# Altium PCB main_old.PcbDoc (part 14 of 15)
Units mil, origin at the board's own origin, x right, y up, seen from the top; angles counter-clockwise.
Board outline 8394.55 x 5164.44 mil, 7 copper layers (Top Layer 1, Layer 2, Layer 3, Unused, Layer 4_pow, Layer 5_gnd, Bottom 6+gnd), stack 46.112 mil thick; 363 components, 409 nets, 1750 pads, 991 vias.
Unrouted connection lines stored in the file: 1.
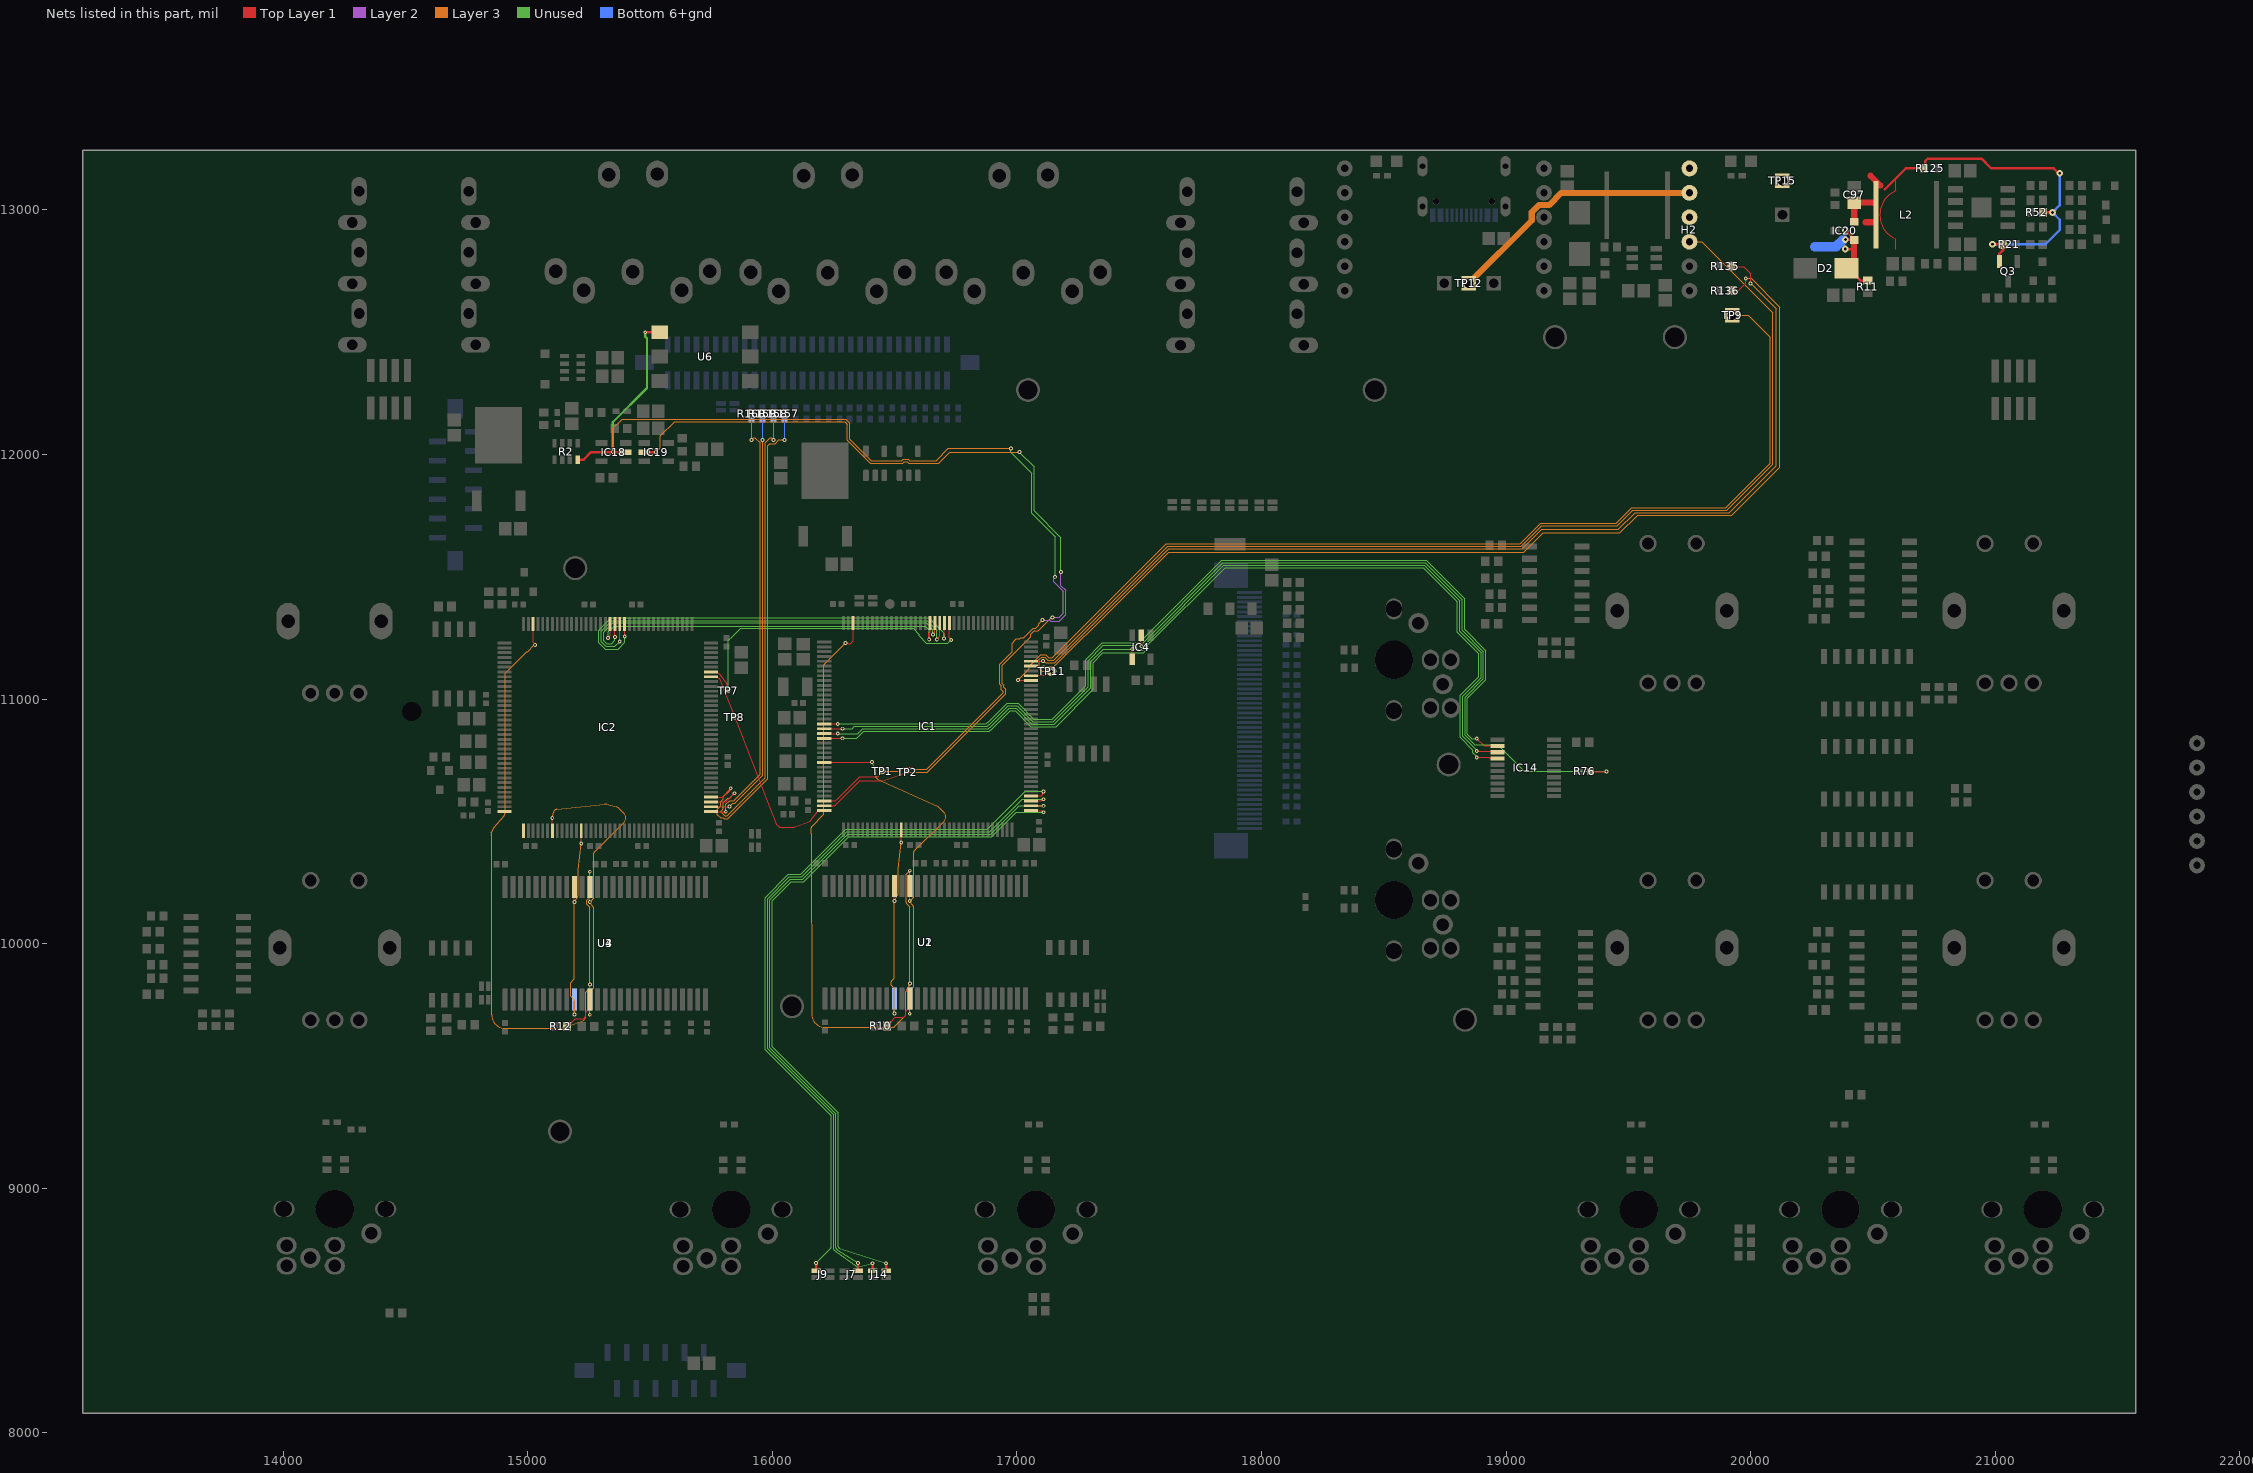
[diagram p17: the nets of this part, all layers, seen from the top]

## Via types
v1: diameter 15.75, hole 7.87, Top Layer 1 to Bottom 6+gnd, tented both sides, 923 vias
v2: diameter 27.56, hole 11.81, Top Layer 1 to Bottom 6+gnd, 45 vias
v3: diameter 23.62/23.62/23.62/23.62/23.62/23.62/23.62 (per signal layer), hole 12, Top Layer 1 to Bottom 6+gnd, tented top, 10 vias
v4: diameter 15.75, hole 7.87, Top Layer 1 to Bottom 6+gnd, 10 vias
v5: diameter 23.62/23.62/23.62/23.62/23.62/23.62/23.62 (per signal layer), hole 12, Top Layer 1 to Bottom 6+gnd, tented bottom, 3 vias

## Nets (pads, with @x,y where several pads share a name; then routed paths per layer and width w, separated by ;. In a path a pad name is that pad's centre, name@x,y a point inside that pad or via, vN(x,y) a via of type N, cw(c..) or ccw(c..) an arc to the next point about the centre after c; other vN are vias at no path point) (continued)
SDNRAS1_7: IC2.49 U3.18 U4.18 | length 997.4
  Top Layer 1 w5: v1@15190.72,10170.19 U3.18@15190.72,10232.03 ; v1(15218.49,10409.41) IC2.49@15218.46,10461.85
  Layer 3 w5: 15189.01,9771.24 15175.59,9784.66 15175.59,9840.83 15190.47,9855.72 v1(15190.47,10169.94) v1@15191.1,10171.08 ; v1(15190.47,9710.68) 15190.44,9767.73 ; v1@15191.16,10171.18 ccw(c15195.47,10168.64) v1@15191.1,10171.08 ; 15205.84,10197.52 15205.84,10301.7 ; v1(15218.49,10409.41) 15205.88,10302.29 ; 15189.04,9771.21 cw(c15185.44,9767.73) 15190.44,9767.73 ; 15189.04,9771.21 cw(c15185.44,9767.73) 15190.44,9767.73 ; 15189.04,9771.21 cw(c15185.44,9767.73) 15190.44,9767.73 ; 15189.04,9771.21 cw(c15185.44,9767.73) 15190.44,9767.73 ; 15189.04,9771.21 cw(c15185.44,9767.73) 15190.44,9767.73 ; 15189.04,9771.21 cw(c15185.44,9767.73) 15190.44,9767.73 ; 15189.04,9771.21 cw(c15185.44,9767.73) 15190.44,9767.73 ; 15189.04,9771.21 cw(c15185.44,9767.73) 15190.44,9767.73 ; 15189.04,9771.21 cw(c15185.44,9767.73) 15190.44,9767.73 ; 15189.04,9771.21 cw(c15185.44,9767.73) 15190.44,9767.73 ; 15189.04,9771.21 cw(c15185.44,9767.73) 15190.44,9767.73 ; 15189.04,9771.21 cw(c15185.44,9767.73) 15190.44,9767.73 ; 15189.04,9771.21 cw(c15185.44,9767.73) 15190.44,9767.73 ; 15189.04,9771.21 cw(c15185.44,9767.73) 15190.44,9767.73 ; 15189.04,9771.21 cw(c15185.44,9767.73) 15190.44,9767.73 ; 15189.04,9771.21 cw(c15185.44,9767.73) 15190.44,9767.73 ; v1@15191.1,10171.08 cw(c15195.47,10168.64) v1@15191.16,10171.17 ; v1@15191.1,10171.08 cw(c15195.47,10168.64) v1@15191.16,10171.17 ; v1@15191.1,10171.08 cw(c15195.47,10168.64) v1@15191.16,10171.17 ; v1@15191.1,10171.08 cw(c15195.47,10168.64) v1@15191.16,10171.17 ; v1@15191.1,10171.08 cw(c15195.47,10168.64) v1@15191.16,10171.17 ; v1@15191.1,10171.08 cw(c15195.47,10168.64) v1@15191.16,10171.17 ; v1@15191.1,10171.08 cw(c15195.47,10168.64) v1@15191.16,10171.17 ; v1@15191.1,10171.08 cw(c15195.47,10168.64) v1@15191.16,10171.17 ; v1@15191.1,10171.08 cw(c15195.47,10168.64) v1@15191.16,10171.17 ; v1@15191.1,10171.08 cw(c15195.47,10168.64) v1@15191.16,10171.17 ; v1@15191.1,10171.08 cw(c15195.47,10168.64) v1@15191.16,10171.17 ; v1@15191.1,10171.08 cw(c15195.47,10168.64) v1@15191.16,10171.17 ; v1@15191.1,10171.08 cw(c15195.47,10168.64) v1@15191.16,10171.17 ; v1@15191.1,10171.08 cw(c15195.47,10168.64) v1@15191.16,10171.17 ; v1@15191.1,10171.08 cw(c15195.47,10168.64) v1@15191.16,10171.17 ; v1@15191.16,10171.17 15205.16,10195.03 ; 15205.16,10195.03 ccw(c15200.84,10197.56) 15205.84,10197.47 ; 15205.16,10195.03 ccw(c15200.84,10197.56) 15205.84,10197.47 ; 15205.16,10195.03 ccw(c15200.84,10197.56) 15205.84,10197.47 ; 15205.16,10195.03 ccw(c15200.84,10197.56) 15205.84,10197.47 ; 15205.16,10195.03 ccw(c15200.84,10197.56) 15205.84,10197.47 ; 15205.16,10195.03 ccw(c15200.84,10197.56) 15205.84,10197.47 ; 15205.16,10195.03 ccw(c15200.84,10197.56) 15205.84,10197.47 ; 15205.16,10195.03 ccw(c15200.84,10197.56) 15205.84,10197.47 ; 15205.16,10195.03 ccw(c15200.84,10197.56) 15205.84,10197.47 ; 15205.16,10195.03 ccw(c15200.84,10197.56) 15205.84,10197.47 ; 15205.16,10195.03 ccw(c15200.84,10197.56) 15205.84,10197.47 ; 15205.16,10195.03 ccw(c15200.84,10197.56) 15205.84,10197.47 ; 15205.16,10195.03 ccw(c15200.84,10197.56) 15205.84,10197.47 ; 15205.16,10195.03 ccw(c15200.84,10197.56) 15205.84,10197.47 ; 15205.16,10195.03 ccw(c15200.84,10197.56) 15205.84,10197.47 ; 15205.16,10195.03 ccw(c15200.84,10197.56) 15205.84,10197.47 ; 15205.84,10301.7 cw(c15210.85,10301.7) 15205.88,10302.29 ; 15205.84,10301.7 cw(c15210.85,10301.7) 15205.88,10302.29 ; 15205.84,10301.7 cw(c15210.85,10301.7) 15205.88,10302.29 ; 15205.84,10301.7 cw(c15210.85,10301.7) 15205.88,10302.29 ; 15205.84,10301.7 cw(c15210.85,10301.7) 15205.88,10302.29 ; 15205.84,10301.7 cw(c15210.85,10301.7) 15205.88,10302.29 ; 15205.84,10301.7 cw(c15210.85,10301.7) 15205.88,10302.29 ; 15205.84,10301.7 cw(c15210.85,10301.7) 15205.88,10302.29 ; 15205.84,10301.7 cw(c15210.85,10301.7) 15205.88,10302.29 ; 15205.84,10301.7 cw(c15210.85,10301.7) 15205.88,10302.29 ; 15205.84,10301.7 cw(c15210.85,10301.7) 15205.88,10302.29 ; 15205.84,10301.7 cw(c15210.85,10301.7) 15205.88,10302.29 ; 15205.84,10301.7 cw(c15210.85,10301.7) 15205.88,10302.29 ; 15205.84,10301.7 cw(c15210.85,10301.7) 15205.88,10302.29 ; 15205.84,10301.7 cw(c15210.85,10301.7) 15205.88,10302.29 ; 15205.84,10301.7 cw(c15210.85,10301.7) 15205.88,10302.29
  Bottom 6+gnd w5: v1(15190.47,9710.68) 15190.47,9771.15 U4.18@15190.72,9771.4
SDNRAS_6: IC1.49 U1.18 U2.18 | length 1102.4
  Top Layer 1 w5: v1(16498.77,10174.13) U1.18@16498.77,10235.97 ; v1@16499.02,10174.38 U1.18@16499.02,10236.22 ; v1(16526.79,10413.6) IC1.49@16526.76,10466.04
  Layer 3 w5: v1(16498.77,9714.87) 16498.77,9812.06 ; 16498.77,9861.98 v1(16498.77,10174.13) v1@16499.4,10175.27 ; 16514.14,10201.71 16514.14,10305.89 ; v1(16526.79,10413.6) 16514.18,10306.48 ; 16497.49,9858.68 ccw(c16493.77,9862.02) 16498.77,9861.93 ; 16497.49,9858.68 ccw(c16493.77,9862.02) 16498.77,9861.93 ; 16497.49,9858.68 ccw(c16493.77,9862.02) 16498.77,9861.93 ; 16497.49,9858.68 ccw(c16493.77,9862.02) 16498.77,9861.93 ; 16497.49,9858.68 ccw(c16493.77,9862.02) 16498.77,9861.93 ; 16497.49,9858.68 ccw(c16493.77,9862.02) 16498.77,9861.93 ; 16497.49,9858.68 ccw(c16493.77,9862.02) 16498.77,9861.93 ; 16497.49,9858.68 ccw(c16493.77,9862.02) 16498.77,9861.93 ; 16497.49,9858.68 ccw(c16493.77,9862.02) 16498.77,9861.93 ; 16497.49,9858.68 ccw(c16493.77,9862.02) 16498.77,9861.93 ; 16497.49,9858.68 ccw(c16493.77,9862.02) 16498.77,9861.93 ; 16497.49,9858.68 ccw(c16493.77,9862.02) 16498.77,9861.93 ; 16497.49,9858.68 ccw(c16493.77,9862.02) 16498.77,9861.93 ; 16497.49,9858.68 ccw(c16493.77,9862.02) 16498.77,9861.93 ; 16497.49,9858.68 ccw(c16493.77,9862.02) 16498.77,9861.93 ; 16497.49,9858.68 ccw(c16493.77,9862.02) 16498.77,9861.93 ; 16497.49,9858.68 16487.84,9847.96 ccw(c16499.26,9837.68) 16487.29,9828.03 16497.66,9815.15 ; 16497.66,9815.15 cw(c16493.77,9812.02) 16498.77,9812.11 ; 16497.66,9815.15 cw(c16493.77,9812.02) 16498.77,9812.11 ; 16497.66,9815.15 cw(c16493.77,9812.02) 16498.77,9812.11 ; 16497.66,9815.15 cw(c16493.77,9812.02) 16498.77,9812.11 ; 16497.66,9815.15 cw(c16493.77,9812.02) 16498.77,9812.11 ; 16497.66,9815.15 cw(c16493.77,9812.02) 16498.77,9812.11 ; 16497.66,9815.15 cw(c16493.77,9812.02) 16498.77,9812.11 ; 16497.66,9815.15 cw(c16493.77,9812.02) 16498.77,9812.11 ; 16497.66,9815.15 cw(c16493.77,9812.02) 16498.77,9812.11 ; 16497.66,9815.15 cw(c16493.77,9812.02) 16498.77,9812.11 ; 16497.66,9815.15 cw(c16493.77,9812.02) 16498.77,9812.11 ; 16497.66,9815.15 cw(c16493.77,9812.02) 16498.77,9812.11 ; 16497.66,9815.15 cw(c16493.77,9812.02) 16498.77,9812.11 ; 16497.66,9815.15 cw(c16493.77,9812.02) 16498.77,9812.11 ; 16497.66,9815.15 cw(c16493.77,9812.02) 16498.77,9812.11 ; 16497.66,9815.15 cw(c16493.77,9812.02) 16498.77,9812.11 ; v1@16499.4,10175.27 cw(c16503.77,10172.83) v1@16499.46,10175.36 ; v1@16499.4,10175.27 cw(c16503.77,10172.83) v1@16499.46,10175.36 ; v1@16499.4,10175.27 cw(c16503.77,10172.83) v1@16499.46,10175.36 ; v1@16499.4,10175.27 cw(c16503.77,10172.83) v1@16499.46,10175.36 ; v1@16499.4,10175.27 cw(c16503.77,10172.83) v1@16499.46,10175.37 ; v1@16499.4,10175.27 cw(c16503.77,10172.83) v1@16499.46,10175.36 ; v1@16499.4,10175.27 cw(c16503.77,10172.83) v1@16499.46,10175.36 ; v1@16499.4,10175.27 cw(c16503.77,10172.83) v1@16499.46,10175.36 ; v1@16499.4,10175.27 cw(c16503.77,10172.83) v1@16499.46,10175.36 ; v1@16499.4,10175.27 cw(c16503.77,10172.83) v1@16499.46,10175.36 ; v1@16499.4,10175.27 cw(c16503.77,10172.83) v1@16499.46,10175.36 ; v1@16499.4,10175.27 cw(c16503.77,10172.83) v1@16499.46,10175.36 ; v1@16499.4,10175.27 cw(c16503.77,10172.83) v1@16499.46,10175.36 ; v1@16499.4,10175.27 cw(c16503.77,10172.83) v1@16499.46,10175.36 ; v1@16499.4,10175.27 cw(c16503.77,10172.83) v1@16499.46,10175.36 ; v1@16499.4,10175.27 cw(c16503.77,10172.83) v1@16499.46,10175.36 ; v1@16499.46,10175.36 16513.46,10199.22 ; 16513.46,10199.22 ccw(c16509.14,10201.75) 16514.14,10201.66 ; 16513.46,10199.22 ccw(c16509.14,10201.75) 16514.14,10201.66 ; 16513.46,10199.22 ccw(c16509.14,10201.75) 16514.14,10201.66 ; 16513.46,10199.22 ccw(c16509.14,10201.75) 16514.14,10201.66 ; 16513.46,10199.22 ccw(c16509.14,10201.75) 16514.14,10201.66 ; 16513.46,10199.22 ccw(c16509.14,10201.75) 16514.14,10201.66 ; 16513.46,10199.22 ccw(c16509.14,10201.75) 16514.14,10201.66 ; 16513.46,10199.22 ccw(c16509.14,10201.75) 16514.14,10201.66 ; 16513.46,10199.22 ccw(c16509.14,10201.75) 16514.14,10201.66 ; 16513.46,10199.22 ccw(c16509.14,10201.75) 16514.14,10201.66 ; 16513.46,10199.22 ccw(c16509.14,10201.75) 16514.14,10201.66 ; 16513.46,10199.22 ccw(c16509.14,10201.75) 16514.14,10201.66 ; 16513.46,10199.22 ccw(c16509.14,10201.75) 16514.14,10201.66 ; 16513.46,10199.22 ccw(c16509.14,10201.75) 16514.14,10201.66 ; 16513.46,10199.22 ccw(c16509.14,10201.75) 16514.14,10201.66 ; 16513.46,10199.22 ccw(c16509.14,10201.75) 16514.14,10201.66 ; 16514.14,10305.89 cw(c16519.15,10305.89) 16514.18,10306.48 ; 16514.14,10305.89 cw(c16519.15,10305.89) 16514.18,10306.48 ; 16514.14,10305.89 cw(c16519.15,10305.89) 16514.18,10306.48 ; 16514.14,10305.89 cw(c16519.15,10305.89) 16514.18,10306.48 ; 16514.14,10305.89 cw(c16519.15,10305.89) 16514.18,10306.48 ; 16514.14,10305.89 cw(c16519.15,10305.89) 16514.18,10306.48 ; 16514.14,10305.89 cw(c16519.15,10305.89) 16514.18,10306.48 ; 16514.14,10305.89 cw(c16519.15,10305.89) 16514.18,10306.48 ; 16514.14,10305.89 cw(c16519.15,10305.89) 16514.18,10306.48 ; 16514.14,10305.89 cw(c16519.15,10305.89) 16514.18,10306.48 ; 16514.14,10305.89 cw(c16519.15,10305.89) 16514.18,10306.48 ; 16514.14,10305.89 cw(c16519.15,10305.89) 16514.18,10306.48 ; 16514.14,10305.89 cw(c16519.15,10305.89) 16514.18,10306.48 ; 16514.14,10305.89 cw(c16519.15,10305.89) 16514.18,10306.48 ; 16514.14,10305.89 cw(c16519.15,10305.89) 16514.18,10306.48 ; 16514.14,10305.89 cw(c16519.15,10305.89) 16514.18,10306.48
  Bottom 6+gnd w5: v1(16498.77,9714.87) 16498.77,9775.34 U2.18@16499.02,9775.59
SDNWE1_7: IC2.43 U3.16 U4.16 | length 2368
  Top Layer 1 w5: IC2.43@15100.32,10461.87 v1@15100.32,10514.16 ; v1@15253.71,10170.19 U3.16@15253.71,10232.03
  Layer 3 w5: v1(15100.09,10514.39) 15105.05,10537.61 cw(c15120.09,10534.39) 15118.51,10549.69 15314.1,10569.87 cw(c15316.7,10544.63) 15323.05,10569.2 15362.66,10558.96 ; v1(15253.46,9709.31) 15253.46,9803 15269.58,9819.12 15269.58,10145.78 ; 15269.15,10187.7 15269.15,10369.91 cw(c15274.15,10369.91) 15270.6,10373.43 15393.65,10496.48 ; v1@15253.46,10167.87 ccw(c15258.46,10167.88) v1@15254.7,10164.58 ; v1@15253.46,10167.87 ccw(c15258.46,10167.88) v1@15254.7,10164.58 ; v1@15253.46,10167.87 ccw(c15258.46,10167.88) v1@15254.7,10164.58 ; v1@15253.46,10167.87 ccw(c15258.46,10167.88) v1@15254.7,10164.58 ; v1@15253.46,10167.87 ccw(c15258.46,10167.88) v1@15254.7,10164.58 ; v1@15253.46,10167.87 ccw(c15258.46,10167.88) v1@15254.7,10164.58 ; v1@15253.46,10167.87 ccw(c15258.46,10167.88) v1@15254.7,10164.58 ; v1@15253.46,10167.87 ccw(c15258.46,10167.88) v1@15254.7,10164.58 ; v1@15253.46,10167.87 ccw(c15258.46,10167.88) v1@15254.7,10164.58 ; v1@15253.46,10167.87 ccw(c15258.46,10167.88) v1@15254.7,10164.58 ; v1@15253.46,10167.87 ccw(c15258.46,10167.88) v1@15254.7,10164.58 ; v1@15253.46,10167.87 ccw(c15258.46,10167.88) v1@15254.7,10164.58 ; v1@15253.46,10167.87 ccw(c15258.46,10167.88) v1@15254.7,10164.58 ; v1@15253.46,10167.87 ccw(c15258.46,10167.88) v1@15254.7,10164.58 ; v1@15253.46,10167.87 ccw(c15258.46,10167.88) v1@15254.7,10164.58 ; v1@15253.46,10167.87 ccw(c15258.46,10167.88) v1@15254.7,10164.58 ; v1@15253.46,10167.87 v1(15253.46,10169.94) 15267.69,10184.22 ; v1@15254.7,10164.58 15268.34,10149.04 ; 15267.69,10184.22 ccw(c15264.15,10187.75) 15269.15,10187.66 ; 15267.69,10184.22 ccw(c15264.15,10187.75) 15269.15,10187.66 ; 15267.69,10184.22 ccw(c15264.15,10187.75) 15269.15,10187.66 ; 15267.69,10184.22 ccw(c15264.15,10187.75) 15269.15,10187.66 ; 15267.69,10184.22 ccw(c15264.15,10187.75) 15269.15,10187.66 ; 15267.69,10184.22 ccw(c15264.15,10187.75) 15269.15,10187.66 ; 15267.69,10184.22 ccw(c15264.15,10187.75) 15269.15,10187.66 ; 15267.69,10184.22 ccw(c15264.15,10187.75) 15269.15,10187.66 ; 15267.69,10184.22 ccw(c15264.15,10187.75) 15269.15,10187.66 ; 15267.69,10184.22 ccw(c15264.15,10187.75) 15269.15,10187.66 ; 15267.69,10184.22 ccw(c15264.15,10187.75) 15269.15,10187.66 ; 15267.69,10184.22 ccw(c15264.15,10187.75) 15269.15,10187.66 ; 15267.69,10184.22 ccw(c15264.15,10187.75) 15269.15,10187.66 ; 15267.69,10184.22 ccw(c15264.15,10187.75) 15269.15,10187.66 ; 15267.69,10184.22 ccw(c15264.15,10187.75) 15269.15,10187.66 ; 15267.69,10184.22 ccw(c15264.15,10187.75) 15269.15,10187.66 ; 15268.34,10149.04 cw(c15264.58,10145.74) 15269.58,10145.83 ; 15268.34,10149.04 cw(c15264.58,10145.74) 15269.58,10145.83 ; 15268.34,10149.04 cw(c15264.58,10145.74) 15269.58,10145.83 ; 15268.34,10149.04 cw(c15264.58,10145.74) 15269.58,10145.83 ; 15268.34,10149.04 cw(c15264.58,10145.74) 15269.58,10145.83 ; 15268.34,10149.04 cw(c15264.58,10145.74) 15269.58,10145.83 ; 15268.34,10149.04 cw(c15264.58,10145.74) 15269.58,10145.83 ; 15268.34,10149.04 cw(c15264.58,10145.74) 15269.58,10145.83 ; 15268.34,10149.04 cw(c15264.58,10145.74) 15269.58,10145.83 ; 15268.34,10149.04 cw(c15264.58,10145.74) 15269.58,10145.83 ; 15268.34,10149.04 cw(c15264.58,10145.74) 15269.58,10145.83 ; 15268.34,10149.04 cw(c15264.58,10145.74) 15269.58,10145.83 ; 15268.34,10149.04 cw(c15264.58,10145.74) 15269.58,10145.83 ; 15268.34,10149.04 cw(c15264.58,10145.74) 15269.58,10145.83 ; 15268.34,10149.04 cw(c15264.58,10145.74) 15269.58,10145.83 ; 15268.34,10149.04 cw(c15264.58,10145.74) 15269.58,10145.83 ; 15362.66,10558.96 cw(c15356.31,10534.39) 15374.54,10552.04 ; 15362.66,10558.96 cw(c15356.31,10534.39) 15374.54,10552.04 ; 15362.66,10558.96 cw(c15356.31,10534.39) 15374.54,10552.04 ; 15362.66,10558.96 cw(c15356.31,10534.39) 15374.54,10552.04 ; 15362.66,10558.96 cw(c15356.31,10534.39) 15374.54,10552.04 ; 15362.66,10558.96 cw(c15356.31,10534.39) 15374.54,10552.04 ; 15362.66,10558.96 cw(c15356.31,10534.39) 15374.54,10552.04 ; 15362.66,10558.96 cw(c15356.31,10534.39) 15374.54,10552.04 ; 15362.66,10558.96 cw(c15356.31,10534.39) 15374.54,10552.04 ; 15362.66,10558.96 cw(c15356.31,10534.39) 15374.54,10552.04 ; 15362.66,10558.96 cw(c15356.31,10534.39) 15374.54,10552.04 ; 15362.66,10558.96 cw(c15356.31,10534.39) 15374.54,10552.04 ; 15362.66,10558.96 cw(c15356.31,10534.39) 15374.54,10552.04 ; 15362.66,10558.96 cw(c15356.31,10534.39) 15374.54,10552.04 ; 15362.66,10558.96 cw(c15356.31,10534.39) 15374.54,10552.04 ; 15362.66,10558.96 cw(c15356.31,10534.39) 15374.54,10552.04 ; 15374.54,10552.04 15393.9,10532.04 ; 15393.65,10496.48 ccw(c15375.68,10514.39) 15393.9,10532.05 ; 15393.65,10496.48 ccw(c15375.68,10514.39) 15393.9,10532.04 ; 15393.65,10496.48 ccw(c15375.68,10514.39) 15393.9,10532.04 ; 15393.65,10496.48 ccw(c15375.68,10514.39) 15393.9,10532.04 ; 15393.65,10496.48 ccw(c15375.68,10514.39) 15393.9,10532.04 ; 15393.65,10496.48 ccw(c15375.68,10514.39) 15393.9,10532.04 ; 15393.65,10496.48 ccw(c15375.68,10514.39) 15393.9,10532.04 ; 15393.65,10496.48 ccw(c15375.68,10514.39) 15393.9,10532.04 ; 15393.65,10496.48 ccw(c15375.68,10514.39) 15393.9,10532.04 ; 15393.65,10496.48 ccw(c15375.68,10514.39) 15393.9,10532.04 ; 15393.65,10496.48 ccw(c15375.68,10514.39) 15393.9,10532.04 ; 15393.65,10496.48 ccw(c15375.68,10514.39) 15393.9,10532.04 ; 15393.65,10496.48 ccw(c15375.68,10514.39) 15393.9,10532.04 ; 15393.65,10496.48 ccw(c15375.68,10514.39) 15393.9,10532.04 ; 15393.65,10496.48 ccw(c15375.68,10514.39) 15393.9,10532.04 ; 15393.65,10496.48 ccw(c15375.68,10514.39) 15393.9,10532.04
  Bottom 6+gnd w5: v1@15253.71,9709.56 U4.16@15253.71,9771.4
SDNWE_6: IC1.26 U1.16 U2.16 | length 2408.3
  Top Layer 1 w5: IC1.26@16212.26,10741.2 16406.98,10741.2 v1(16407.89,10742.1) ; v1@16562.01,10174.38 U1.16@16562.01,10236.22
  Layer 3 w5: v1(16407.89,10742.1) 16422.16,10683.52 ccw(c16437.09,10687.2) 16430.7,10673.22 16675.14,10561.67 cw(c16664.61,10538.58) 16682.83,10556.24 16702.2,10536.23 ; v1(16561.76,9713.5) 16561.76,9805.11 cw(c16566.76,9805.12) 16563.21,9808.63 16576.43,9821.89 ; v1@16562.99,10168.77 16576.64,10153.23 ; 16577.45,10191.89 16577.45,10374.1 cw(c16582.45,10374.1) 16578.9,10377.62 16701.95,10500.67 ; 16577.88,9825.38 16577.88,10149.97 ; v1@16561.76,10172.06 ccw(c16566.76,10172.06) v1@16562.99,10168.78 ; v1@16561.76,10172.06 ccw(c16566.76,10172.06) v1@16562.99,10168.78 ; v1@16561.76,10172.06 ccw(c16566.76,10172.06) v1@16562.99,10168.78 ; v1@16561.76,10172.06 ccw(c16566.76,10172.06) v1@16562.99,10168.78 ; v1@16561.76,10172.06 ccw(c16566.76,10172.06) v1@16562.99,10168.78 ; v1@16561.76,10172.06 ccw(c16566.76,10172.06) v1@16562.99,10168.78 ; v1@16561.76,10172.06 ccw(c16566.76,10172.06) v1@16562.99,10168.78 ; v1@16561.76,10172.06 ccw(c16566.76,10172.06) v1@16562.99,10168.78 ; v1@16561.76,10172.06 ccw(c16566.76,10172.06) v1@16562.99,10168.78 ; v1@16561.76,10172.06 ccw(c16566.76,10172.06) v1@16562.99,10168.78 ; v1@16561.76,10172.06 ccw(c16566.76,10172.06) v1@16562.99,10168.78 ; v1@16561.76,10172.06 ccw(c16566.76,10172.06) v1@16562.99,10168.78 ; v1@16561.76,10172.06 ccw(c16566.76,10172.06) v1@16562.99,10168.78 ; v1@16561.76,10172.06 ccw(c16566.76,10172.06) v1@16562.99,10168.78 ; v1@16561.76,10172.06 ccw(c16566.76,10172.06) v1@16562.99,10168.78 ; v1@16561.76,10172.06 ccw(c16566.76,10172.06) v1@16562.99,10168.78 ; v1@16561.76,10172.06 v1(16561.76,10174.13) 16575.99,10188.41 ; 16575.99,10188.41 ccw(c16572.45,10191.94) 16577.45,10191.85 ; 16575.99,10188.41 ccw(c16572.45,10191.94) 16577.45,10191.85 ; 16575.99,10188.41 ccw(c16572.45,10191.94) 16577.45,10191.85 ; 16575.99,10188.41 ccw(c16572.45,10191.94) 16577.45,10191.85 ; 16575.99,10188.41 ccw(c16572.45,10191.94) 16577.45,10191.85 ; 16575.99,10188.41 ccw(c16572.45,10191.94) 16577.45,10191.85 ; 16575.99,10188.41 ccw(c16572.45,10191.94) 16577.45,10191.85 ; 16575.99,10188.41 ccw(c16572.45,10191.94) 16577.45,10191.85 ; 16575.99,10188.41 ccw(c16572.45,10191.94) 16577.45,10191.85 ; 16575.99,10188.41 ccw(c16572.45,10191.94) 16577.45,10191.85 ; 16575.99,10188.41 ccw(c16572.45,10191.94) 16577.45,10191.85 ; 16575.99,10188.41 ccw(c16572.45,10191.94) 16577.45,10191.85 ; 16575.99,10188.41 ccw(c16572.45,10191.94) 16577.45,10191.85 ; 16575.99,10188.41 ccw(c16572.45,10191.94) 16577.45,10191.85 ; 16575.99,10188.41 ccw(c16572.45,10191.94) 16577.45,10191.85 ; 16575.99,10188.41 ccw(c16572.45,10191.94) 16577.45,10191.85 ; 16576.43,9821.89 ccw(c16572.88,9825.42) 16577.88,9825.33 ; 16576.43,9821.89 ccw(c16572.88,9825.42) 16577.88,9825.33 ; 16576.43,9821.89 ccw(c16572.88,9825.42) 16577.88,9825.33 ; 16576.43,9821.89 ccw(c16572.88,9825.42) 16577.88,9825.33 ; 16576.43,9821.89 ccw(c16572.88,9825.42) 16577.88,9825.33 ; 16576.43,9821.89 ccw(c16572.88,9825.42) 16577.88,9825.33 ; 16576.43,9821.89 ccw(c16572.88,9825.42) 16577.88,9825.33 ; 16576.43,9821.89 ccw(c16572.88,9825.42) 16577.88,9825.33 ; 16576.43,9821.89 ccw(c16572.88,9825.42) 16577.88,9825.33 ; 16576.43,9821.89 ccw(c16572.88,9825.42) 16577.88,9825.33 ; 16576.43,9821.89 ccw(c16572.88,9825.42) 16577.88,9825.33 ; 16576.43,9821.89 ccw(c16572.88,9825.42) 16577.88,9825.33 ; 16576.43,9821.89 ccw(c16572.88,9825.42) 16577.88,9825.33 ; 16576.43,9821.89 ccw(c16572.88,9825.42) 16577.88,9825.33 ; 16576.43,9821.89 ccw(c16572.88,9825.42) 16577.88,9825.33 ; 16576.43,9821.89 ccw(c16572.88,9825.42) 16577.88,9825.33 ; 16576.64,10153.23 cw(c16572.88,10149.93) 16577.88,10150.02 ; 16576.64,10153.23 cw(c16572.88,10149.93) 16577.88,10150.02 ; 16576.64,10153.23 cw(c16572.88,10149.93) 16577.88,10150.02 ; 16576.64,10153.23 cw(c16572.88,10149.93) 16577.88,10150.02 ; 16576.64,10153.23 cw(c16572.88,10149.93) 16577.88,10150.02 ; 16576.64,10153.23 cw(c16572.88,10149.93) 16577.88,10150.02 ; 16576.64,10153.23 cw(c16572.88,10149.93) 16577.88,10150.02 ; 16576.64,10153.23 cw(c16572.88,10149.93) 16577.88,10150.02 ; 16576.64,10153.23 cw(c16572.88,10149.93) 16577.88,10150.02 ; 16576.64,10153.23 cw(c16572.88,10149.93) 16577.88,10150.02 ; 16576.64,10153.23 cw(c16572.88,10149.93) 16577.88,10150.02 ; 16576.64,10153.23 cw(c16572.88,10149.93) 16577.88,10150.02 ; 16576.64,10153.23 cw(c16572.88,10149.93) 16577.88,10150.02 ; 16576.64,10153.23 cw(c16572.88,10149.93) 16577.88,10150.02 ; 16576.64,10153.23 cw(c16572.88,10149.93) 16577.88,10150.02 ; 16576.64,10153.23 cw(c16572.88,10149.93) 16577.88,10150.02 ; 16701.95,10500.67 ccw(c16683.98,10518.58) 16702.2,10536.23 ; 16701.95,10500.67 ccw(c16683.98,10518.58) 16702.2,10536.23 ; 16701.95,10500.67 ccw(c16683.98,10518.58) 16702.2,10536.23 ; 16701.95,10500.67 ccw(c16683.98,10518.58) 16702.2,10536.23 ; 16701.95,10500.67 ccw(c16683.98,10518.58) 16702.2,10536.23 ; 16701.95,10500.67 ccw(c16683.98,10518.58) 16702.2,10536.24 ; 16701.95,10500.67 ccw(c16683.98,10518.58) 16702.2,10536.23 ; 16701.95,10500.67 ccw(c16683.98,10518.58) 16702.2,10536.23 ; 16701.95,10500.67 ccw(c16683.98,10518.58) 16702.2,10536.23 ; 16701.95,10500.67 ccw(c16683.98,10518.58) 16702.2,10536.23 ; 16701.95,10500.67 ccw(c16683.98,10518.58) 16702.2,10536.23 ; 16701.95,10500.67 ccw(c16683.98,10518.58) 16702.2,10536.23 ; 16701.95,10500.67 ccw(c16683.98,10518.58) 16702.2,10536.23 ; 16701.95,10500.67 ccw(c16683.98,10518.58) 16702.2,10536.23 ; 16701.95,10500.67 ccw(c16683.98,10518.58) 16702.2,10536.23 ; 16701.95,10500.67 ccw(c16683.98,10518.58) 16702.2,10536.23
  Bottom 6+gnd w5: v1@16562.01,9713.75 U2.16@16562.01,9775.59
SPI1_MISO: IC1.124 IC2.124 | length 1725.5
  Top Layer 1 w5: v1@15375.96,11234.87 IC2.124@15375.97,11307.38 ; v1(16672.21,11243.72) 16672.21,11245 16684.21,11257 IC1.124@16684.21,11311.57
  Unused w5: v1(15375.95,11234.85) 15374.85,11234.85 15355.74,11215.74 15318.93,11215.74 15300,11234.68 15300,11277.96 15343.21,11321.17 16633.71,11321.17 16672.37,11282.5 16672.37,11243.88 v1(16672.21,11243.72)
SPI1_MOSI: IC1.123 IC2.123 | length 1802.5
  Top Layer 1 w5: IC2.123@15395.66,11307.38 15395.9,11307.15 15395.9,11255.5 v1(15396.13,11255.26) ; v1(16702.09,11247.2) 16702.99,11248.11 16702.99,11310.67 IC1.123@16703.9,11311.57
  Unused w5: v1(15396.13,11255.26) 15396.13,11232.05 15368.8,11204.72 15315.82,11204.72 15290,11230.53 15290,11282.1 15341.14,11333.24 16638.71,11333.24 16702.09,11269.86 v1(16702.09,11247.2)
SPI1_NSS: IC1.125 IC2.125 | length 1601.7
  Top Layer 1 w5: v1(15355.97,11254.61) 15356.13,11254.77 15356.13,11307.23 IC2.125@15356.29,11307.38 ; v1(16657,11264.49) 16657,11265.71 16664.53,11273.24 IC1.125@16664.53,11311.57
  Unused w5: v1(15355.97,11254.61) 15355.97,11240.61 15342.4,11227.04 15321.78,11227.04 15310,11238.82 15310,11273.82 15347.35,11311.17 16629.56,11311.17 16656.64,11284.09 16656.64,11264.85 v1(16657,11264.49)
SPI1_SCK: IC1.126 IC2.126 | length 1523.1
  Top Layer 1 w5: v1(15328.33,11250.26) 15336.6,11258.53 IC2.126@15336.6,11307.38 ; v1(16641.05,11244.02) 16640.18,11244.89 16640.18,11270.38 16644.84,11275.04 IC1.126@16644.84,11311.57
  Unused w5: v1(15328.33,11250.26) 15328.33,11274.69 15352.47,11298.82 16624.45,11298.82 16641.63,11281.64 16641.63,11244.6 v1(16641.05,11244.02)
SPI2_ext.MISO_1: IC1.75 J14.2 | length 3111.9
  Top Layer 1 w5: IC1.75@17057.76,10583.7 17100.02,10583.7 17106.72,10590.4 v1(17108,10590.4)
  Top Layer 1 w10: J14.2@16410,8661.38 v1@16410,8693.12
  Unused w5: v1(16409.77,8693.35) 16353.4,8679.63 cw(c16349.77,8694.57) 16340.81,8682.08 16260.43,8739.72 cw(c16275,8760.03) 16258.05,8741.66 16251.61,8747.6 cw(c16255,8751.27) 16250,8751.27 16250,9300.53 15980,9570.53 15980,10184.25 16069.57,10273.82 16120.32,10273.82 16267.43,10420.93 16267.64,10420.93 16303.88,10457.17 16888.35,10457.17 17021.58,10590.4 v1(17108,10590.4)
SPI2_ext.MOSI_1: IC1.76 J9.4 | length 3044.7
  Top Layer 1 w5: IC1.76@17057.76,10603.38 17059.88,10605.51 17101.31,10605.51 17105.94,10610.14 17105.94,10620.51 v1(17108,10622.57)
  Top Layer 1 w10: J9.4@16178.66,8662.72 v1@16178.66,8694.46
  Unused w5: v1(16178.43,8694.69) 16238.53,8754.82 ccw(c16235,8758.36) 16240,8758.36 16240,9296.39 15970,9566.39 15970,10188.39 16065.43,10283.82 16116.18,10283.82 16263.29,10430.93 16263.5,10430.93 16299.74,10467.17 16878.35,10467.17 17033.75,10622.57 v1(17108,10622.57)
SPI2_ext.NSS_1: IC1.73 J14.4 | length 3077.8
  Top Layer 1 w5: IC1.73@17057.76,10544.33 17100.41,10544.33 17107.49,10537.25 v1(17108,10537.25)
  Top Layer 1 w10: J14.4@16465.12,8661.38 v1@16465.12,8693.12
  Unused w5: v1(16464.89,8693.35) 16273.44,8755.28 cw(c16275,8760.03) 16270,8760.03 16270,9308.82 16000,9578.82 16000,10175.96 16076.93,10252.9 16127.68,10252.9 16275.71,10400.93 16275.92,10400.93 16312.17,10437.17 16897.5,10437.17 16997.57,10537.25 v1(17108,10537.25)
SPI2_ext.SCK_1: IC1.74 J7.4 | length 3004.6
  Top Layer 1 w5: IC1.74@17057.76,10564.01 17057.91,10563.86 17107.84,10563.86 v1(17108,10563.7)
  Top Layer 1 w10: J7.4@16350,8662.6 v1@16350,8694.34
  Unused w5: v1(16349.77,8694.57) 16266.94,8747.38 cw(c16275,8760.03) 16264.42,8749.4 16261.45,8752.37 cw(c16265,8755.89) 16260,8755.89 16260,9304.68 15990,9574.68 15990,10180.11 16073.71,10263.82 16124.46,10263.82 16271.57,10410.93 16271.78,10410.93 16308.03,10447.17 16893.35,10447.17 17009.89,10563.7 v1(17108,10563.7)
SPI2_MISO: IC2.75 R158.1 | length 1969.1
  Top Layer 1 w5: IC2.75@15749.52,10579.51 15809.51,10579.51 v1(15845,10615)
  Layer 3 w5: v1(15845,10615) 15825,10595 15817.93,10595 15810,10587.07 15810,10586.99 15799.55,10576.55 15799.55,10571.73 15798.98,10571.16 15798.98,10550.74 15790.44,10542.21 15790.44,10536.77 15806.33,10520.88 15809.47,10524.03 15815.92,10524.03 15970,10678.11 15970,12048.26 15991.3,12069.56 15995.44,12069.56 v1(16005,12060)
  Bottom 6+gnd w5: v1(16005,12060) R158.1@16005,12144.72
SPI2_MOSI: IC2.76 R157.1 | length 2031.6
  Top Layer 1 w5: IC2.76@15749.52,10599.2 15794.2,10599.2 15829.55,10634.55 v1(15829.55,10635.6)
  Layer 3 w5: v1(15829.55,10635.6) 15827.49,10633.54 15827.49,10627.49 15800,10600 15800,10591.14 15788.37,10579.51 15788.37,10563.37 15775,10550 15775,10528.08 15788.37,10514.71 15798.36,10514.71 15802.19,10510.88 15816.92,10510.88 15980,10673.97 15980,12035 15989.63,12044.63 16011.37,12044.63 16026.74,12060 v1(16050,12060)
  Bottom 6+gnd w5: v1(16050,12060) R157.1@16050,12144.72
SPI2_NSS: IC2.73 R160.1 | length 1770.4
  Top Layer 1 w5: IC2.73@15749.52,10540.14 15808.81,10540.14 v1(15809.55,10539.4)
  Layer 3 w5: v1(15809.55,10539.4) 15809.55,10553.71 15808.98,10554.28 15808.98,10567.02 15809.55,10567.59 15809.55,10569.55 15825,10585 15842.16,10585 15950,10692.84 15950,12048.26 15928.7,12069.56 15924.56,12069.56 v1(15915,12060)
  Bottom 6+gnd w5: v1(15915,12060) R160.1@15915,12144.72
SPI2_SCK: IC2.74 R159.1 | length 1719.9
  Top Layer 1 w5: IC2.74@15749.52,10559.83 15749.93,10560.24 15823.94,10560.24 v1(15824.35,10560.65)
  Layer 3 w5: v1(15824.35,10560.65) 15838.7,10575 15846.3,10575 15960,10688.7 v1(15960,12060)
  Bottom 6+gnd w5: v1(15960,12060) R159.1@15960,12144.72
SPI5_MISO: IC1.20 IC4.4 | length 1561.4
  Top Layer 1 w5: IC1.20@16212.32,10859.22 v1@16267.2,10859.22 ; IC4.4@17470.98,11162.52 17470.98,11203.36 v1(17472.21,11204.59)
  Unused w5: v1(16267.27,10859.14) 16349.88,10859.14 16369.25,10878.51 16882.03,10878.51 16888.55,10885.04 16890.36,10885.04 16967.67,10962.34 16996.26,10962.34 17060.74,10897.86 17152.33,10897.86 17301.29,11046.82 17301.29,11153.51 17352.36,11204.59 v1(17472.21,11204.59)
SPI5_MOSI: IC1.21 IC14.4 | length 3881.6
  Top Layer 1 w5: IC1.21@16212.26,10839.62 v1(16286.38,10839.64) ; v1(18880,10761.57) 18928.42,10761.57 18932.79,10757.2 IC14.4@18964.33,10757.2
  Unused w5: v1(16286.38,10839.64) 16344.53,10839.64 16373.4,10868.51 16886.17,10868.51 16892.69,10875.04 16894.5,10875.04 16971.81,10952.34 16992.11,10952.34 17056.59,10887.86 17159.65,10887.86 17311.29,11039.51 17311.29,11149.37 17351,11189.09 17519.35,11189.09 17535.79,11205.53 17535.79,11223.04 17850.69,11537.94 18660.88,11537.94 18800,11398.82 18800,11273.06 18887.48,11185.58 18887.48,11090.67 18812.13,11015.33 18812.13,10844.26 18864.63,10791.77 18864.63,10780.95 18880,10765.58 v1(18880,10761.57)
SPI5_NSS: IC1.18 IC14.2 | length 3840.1
  Top Layer 1 w5: IC1.18@16212.24,10898.66 16212.32,10898.59 16267.2,10898.59 v1(16267.27,10898.51) ; v1(18880,10838.82) 18910.43,10808.38 IC14.2@18964.33,10808.38
  Unused w5: v1(16267.27,10898.51) 16873.75,10898.51 16880.27,10905.04 16882.08,10905.04 16959.38,10982.34 17004.54,10982.34 17069.02,10917.86 17144.05,10917.86 17281.29,11055.11 17281.29,11161.8 17349.45,11229.96 17500.29,11229.96 17838.26,11567.94 18673.31,11567.94 18830,11411.25 18830,11285.48 18917.48,11198.01 18917.48,11078.24 18842.13,11002.9 18842.13,10856.68 18860,10838.82 v1(18880,10838.82)
SPI5_SCK: IC1.19 IC14.3 | length 3871.6
  Top Layer 1 w5: IC1.19@16212.26,10878.99 v1(16286.38,10879.01) ; v1(18880,10787.32) 18959.8,10787.32 IC14.3@18964.33,10782.79
  Unused w5: v1(16286.38,10879.01) 16325.9,10879.01 16335.4,10888.51 16877.89,10888.51 16884.41,10895.04 16886.22,10895.04 16963.52,10972.34 17000.4,10972.34 17064.88,10907.86 17148.19,10907.86 17291.29,11050.96 17291.29,11157.66 17353.59,11219.96 17478.58,11219.96 17499.46,11199.09 17515.21,11199.09 17525.79,11209.67 17525.79,11227.19 17846.55,11547.94 18665.02,11547.94 18810,11402.96 18810,11277.2 18897.48,11189.72 18897.48,11086.53 18822.13,11011.19 18822.13,10848.4 18880,10790.53 v1(18880,10787.32)
UART1_RX: IC1.122 IC2.102 TP7.1 | length 1359.8
  Top Layer 1 w5: IC2.102@15749.52,11111.01 15776.05,11107.6 15782.5,11103.6 cw(c15778.55,11097.23) 15784.65,11101.6 15812.49,11062.78 cw(c15800,11053.82) 15815.03,11057.03 v1(15820,11033.82) ; IC1.122@16723.58,11311.57 16723.58,11249.86 v1(16731.3,11242.15)
  Unused w5: v1(15820,11033.82) 15820,11240.67 15836.97,11257.63 15838.81,11257.63 15870,11288.82 16575,11288.82 16600,11263.82 16600,11258.4 16630.06,11228.34 16717.49,11228.34 v1(16731.3,11242.15)
UART1_TX: IC1.36 IC2.101 TP8.1 | length 899.1
  Top Layer 1 w5: IC2.101@15749.52,11091.32 15776.05,11087.92 15782.5,11083.92 cw(c15778.55,11077.54) 15785.55,11080.25 15805.66,11028.27 15845.7,10925.27 16014.29,10491.58 ccw(c16023.61,10495.21) 16016.54,10488.14 16025.26,10479.41 ccw(c16032.33,10486.49) 16032.33,10476.49 16087.67,10476.49 ccw(c16087.67,10486.49) 16091.15,10477.11 16150.58,10499.18 ccw(c16145.22,10513.6) 16157.4,10504.21 16185.71,10540.93 IC1.36@16212.24,10544.33
  other v1: 15845,10925
UART2_RX: IC2.37
UART2_TX: IC2.36
UART4_RX: IC1.35 IC18.2 R2.4 TP2.1 U6.4 | length 4849.6
  Top Layer 1 w5: IC1.35@16212.24,10564.01 16255.3,10564.01 16357.01,10665.72 16449.26,10665.72 ; 16451.23,10666.12 v1(16552.09,10701.2)
  Top Layer 1 w10: R2.4@15203.45,11978.65 15227.74,11978.65 15258.8,12009.71 v1(15347.23,12009.71) IC18.2@15399.63,12009.71 ; v1(15480,12500) U6.4@15539.96,12500
  Layer 2 w5: v1(17145,11333.82) 17173.82,11333.82 17190,11350 17190,11440 17150,11480 17150,11491.7 17155.75,11497.44 v1(17155.75,11500)
  Unused w5: v1(16975,12025) 16975,12009.03 17060,11924.03 17060,11760 17155.75,11664.25 v1(17155.75,11500)
  Unused w10: v1(15347.23,12009.71) 15347.23,12132.23 15487.25,12272.25 15487.25,12475.08 15480,12482.33 v1(15480,12500)
  Layer 3 w5: v1(15347.23,12009.71) 15347.23,12107.11 15385.12,12145 16300,12145 16316.9,12128.1 16316.9,12063.1 16405,11975 16529.12,11975 16534.49,11980.37 16555.51,11980.37 16560.88,11975 16670,11975 16720,12025 v1(16975,12025) ; v1(16552.09,10701.2) 16633.24,10701.2 16953.79,11021.75 16953.79,11040.89 16945.34,11049.33 16945.34,11057.98 16940,11063.32 16940,11138.82 17056.71,11255.53 17056.71,11264.57 17070.96,11278.82 17086.32,11278.82 17137.29,11329.79 17138.06,11329.79 17142.09,11333.82 v1(17145,11333.82)
UART4_TX: IC1.34 IC19.2 TP1.1 | length 3916.3
  Top Layer 1 w5: IC1.34@16212.24,10583.7 16257.84,10583.7 16266.97,10592.83 16356.34,10682.2 16429.74,10682.2 ccw(c16429.74,10687.2) 16433.59,10684.01 TP1.1@16449.48,10703.14
  Top Layer 1 w10: IC19.2@15476.2,12009.71 15522.67,12009.71 v1(15523.34,12010.38)
  Layer 2 w5: v1(17104.29,11323.07) 17134,11323.07 17138.63,11318.44 17172.59,11318.44 17200,11345.86 17200,11444.14 17180,11464.14 v1(17180,11520)
  Unused w5: v1(17010,12010) 17070,11950 17070,11770 17180,11660 v1(17180,11520)
  Layer 3 w5: v1(15523.34,12010.38) 15541.58,12028.61 15541.58,12076.58 15600,12135 16295.86,12135 16306.9,12123.96 16306.9,12058.1 16400,11965 16533.26,11965 16538.63,11970.37 16551.37,11970.37 16556.74,11965 16680,11965 16725,12010 16968.26,12010 16968.63,12009.63 16981.37,12009.63 16981.74,12010 v1(17010,12010) ; v3(16450.09,10705.2) 16519.55,10705.2 16536.35,10722.01 16572.12,10722.01 16580.31,10713.82 16631.72,10713.82 16943.79,11025.89 16943.79,11030.03 16935.34,11038.48 16935.34,11053.84 16928.76,11060.41 16928.76,11077.58 16930,11078.82 16930,11142.96 16980,11192.96 16980,11197.08 16980.37,11197.45 16980.37,11210.19 16980,11210.56 16980,11228.89 16997.82,11246.7 17011.99,11246.7 17015.77,11250.48 17028.34,11250.48 17066.67,11288.82 17075.86,11288.82 17089.05,11302.01 17089.05,11307.83 v1(17104.29,11323.07)
UDQM1_7: IC2.142 R12.2 U3.39 U4.39 | length 3013
  Top Layer 1 w5: IC2.142@15021.64,11307.32 15021.64,11232.6 15030.07,11224.17 v1(15030.07,11221.26) ; R12.2@15160.52,9659.63 15160.52,9661.6 15162.49,9661.6 15194.83,9693.94 15228.44,9693.94 15237.45,9702.94 15237.45,9720.14 15253.71,9736.4 15253.71,9771.4 v1@15253.71,9833.24
  Layer 3 w5: 14906.7,11090.76 14906.7,10533.22 cw(c14901.7,10533.23) 14906.69,10532.85 14906.63,10532.11 cw(c14891.67,10533.22) 14903.05,10523.44 14861.05,10474.26 ccw(c14895.27,10445.04) 14851.33,10454.74 14850.83,10452.49 ccw(c14875.25,10447.09) 14850.25,10447.16 14850.25,10444.98 14850.55,10444.62 cw(c14846.75,10441.38) 14851.75,10441.41 14851.75,9709.35 ccw(c14907.12,9709.43) 14907.08,9654.05 14938.38,9653.94 ccw(c14938.46,9673.94) 14938.46,9653.94 15064.6,9653.94 ; 14906.7,11090.81 14906.7,11105.49 14995.6,11194.39 15000.3,11194.39 15027.16,11221.26 v1(15030.07,11221.26) ; 15064.63,9653.94 15127.6,9654.1 ccw(c15127.48,9709.47) 15144.81,9656.88 15173.16,9666.21 ccw(c15158.97,9709.31) 15174.12,9666.54 15221.39,9683.27 ccw(c15213.4,9705.96) 15237.45,9705.74 15237.45,9801.12 15253.95,9817.63 v1(15253.95,9833.49) 15253.95,10145.68 ccw(c15248.95,10145.59) 15252.5,10149.12 15242.57,10159.1 cw(c15253.46,10169.94) 15241.94,10180.12 15252.7,10192.29 ccw(c15248.95,10195.6) 15253.95,10195.51 ; v1(15253.46,10294.12) 15253.95,10293.63 15253.95,10195.56
  Bottom 6+gnd w5: U4.39@15253.71,10232.03 v1@15253.71,10293.87
UDQM_6: IC1.142 R10.2 U1.39 U2.39 | length 4556.5
  Top Layer 1 w5: v1(16298.24,11229.33) 16298.74,11228.82 16308.66,11228.82 16311.16,11226.32 16318.59,11226.32 16329.88,11237.61 16329.88,11311.46 IC1.142@16329.94,11311.51 ; R10.2@16468.82,9663.82 16468.82,9665.79 16483.05,9680.02 16485.02,9680.02 16503.13,9698.13 16536.74,9698.13 16545.75,9707.13 16545.75,9724.33 16562.01,9740.59 U1.39@16562.01,9775.59 v1@16562.01,9837.43
  Layer 3 w5: 16158.55,10450.26 16160.05,9713.53 ; 16158.55,10450.28 16158.55,10470.68 cw(c16173.55,10470.68) 16158.55,10470.79 16158.57,10474.89 ; v1(16298.24,11229.33) 16212.11,11141.48 ccw(c16215.68,11137.98) 16210.68,11137.98 16210.68,10529.03 16160.01,10478.36 ; 16485.64,9657.93 16481.49,9657.93 16246.6,9658.13 16215.21,9658.24 ; 16485.69,9657.93 16494.52,9657.96 ; v1(16561.76,10298.31) 16546.39,10282.93 16546.39,10168.26 ; 16562.25,10148.25 v1(16562.25,9837.68) cw(c16557.25,9837.68) 16561.7,9835.38 16546.3,9805.53 ccw(c16550.75,9803.24) 16545.75,9803.24 16545.75,9707.13 16498.01,9659.4 ; 16158.57,10474.89 cw(c16163.57,10474.85) 16159.99,10478.34 ; 16158.57,10474.89 cw(c16163.57,10474.85) 16159.99,10478.34 ; 16158.57,10474.89 cw(c16163.57,10474.85) 16159.99,10478.34 ; 16158.57,10474.89 cw(c16163.57,10474.85) 16159.99,10478.34 ; 16158.57,10474.89 cw(c16163.57,10474.85) 16159.99,10478.34 ; 16158.57,10474.89 cw(c16163.57,10474.85) 16159.99,10478.34 ; 16158.57,10474.89 cw(c16163.57,10474.85) 16159.99,10478.34 ; 16158.57,10474.89 cw(c16163.57,10474.85) 16159.99,10478.34 ; 16158.57,10474.89 cw(c16163.57,10474.85) 16159.99,10478.34 ; 16158.57,10474.89 cw(c16163.57,10474.85) 16159.99,10478.34 ; 16158.57,10474.89 cw(c16163.57,10474.85) 16159.99,10478.34 ; 16158.57,10474.89 cw(c16163.57,10474.85) 16159.99,10478.34 ; 16158.57,10474.89 cw(c16163.57,10474.85) 16159.99,10478.34 ; 16158.57,10474.89 cw(c16163.57,10474.85) 16159.99,10478.34 ; 16158.57,10474.89 cw(c16163.57,10474.85) 16159.99,10478.34 ; 16158.57,10474.89 cw(c16163.57,10474.85) 16159.99,10478.34 ; 16160.05,9713.53 ccw(c16215.42,9713.62) 16215.21,9658.24 ; 16160.05,9713.53 ccw(c16215.42,9713.62) 16215.21,9658.24 ; 16160.05,9713.53 ccw(c16215.42,9713.62) 16215.21,9658.24 ; 16160.05,9713.53 ccw(c16215.42,9713.62) 16215.21,9658.24 ; 16160.05,9713.53 ccw(c16215.42,9713.62) 16215.21,9658.24 ; 16160.05,9713.53 ccw(c16215.42,9713.62) 16215.21,9658.24 ; 16160.05,9713.53 ccw(c16215.42,9713.62) 16215.21,9658.24 ; 16160.05,9713.53 ccw(c16215.42,9713.62) 16215.21,9658.24 ; 16160.05,9713.53 ccw(c16215.42,9713.62) 16215.21,9658.24 ; 16160.05,9713.53 ccw(c16215.42,9713.62) 16215.21,9658.24 ; 16160.05,9713.53 ccw(c16215.42,9713.62) 16215.21,9658.24 ; 16160.05,9713.53 ccw(c16215.42,9713.62) 16215.21,9658.24 ; 16160.05,9713.53 ccw(c16215.42,9713.62) 16215.21,9658.24 ; 16160.05,9713.53 ccw(c16215.42,9713.62) 16215.21,9658.24 ; 16160.05,9713.53 ccw(c16215.42,9713.62) 16215.21,9658.24 ; 16160.05,9713.53 ccw(c16215.42,9713.62) 16215.21,9658.24 ; 16494.52,9657.96 ccw(c16494.5,9662.96) 16497.99,9659.38 ; 16494.52,9657.96 ccw(c16494.5,9662.96) 16497.99,9659.38 ; 16494.52,9657.96 ccw(c16494.5,9662.96) 16497.99,9659.38 ; 16494.52,9657.96 ccw(c16494.5,9662.96) 16497.99,9659.38 ; 16494.52,9657.96 ccw(c16494.5,9662.96) 16497.99,9659.38 ; 16494.52,9657.96 ccw(c16494.5,9662.96) 16497.99,9659.38 ; 16494.52,9657.96 ccw(c16494.5,9662.96) 16497.99,9659.38 ; 16494.52,9657.96 ccw(c16494.5,9662.96) 16497.99,9659.38 ; 16494.52,9657.96 ccw(c16494.5,9662.96) 16497.99,9659.38 ; 16494.52,9657.96 ccw(c16494.5,9662.96) 16497.99,9659.38 ; 16494.52,9657.96 ccw(c16494.5,9662.96) 16497.99,9659.38 ; 16494.52,9657.96 ccw(c16494.5,9662.96) 16497.99,9659.38 ; 16494.52,9657.96 ccw(c16494.5,9662.96) 16497.99,9659.38 ; 16494.52,9657.96 ccw(c16494.5,9662.96) 16497.99,9659.38 ; 16494.52,9657.96 ccw(c16494.5,9662.96) 16497.99,9659.38 ; 16494.52,9657.96 ccw(c16494.5,9662.96) 16497.99,9659.38 ; 16546.39,10168.26 ccw(c16551.39,10168.26) 16547.86,10164.72 ; 16546.39,10168.26 ccw(c16551.39,10168.26) 16547.86,10164.72 ; 16546.39,10168.26 ccw(c16551.39,10168.26) 16547.86,10164.72 ; 16546.39,10168.26 ccw(c16551.39,10168.26) 16547.86,10164.72 ; 16546.39,10168.26 ccw(c16551.39,10168.26) 16547.86,10164.72 ; 16546.39,10168.26 ccw(c16551.39,10168.26) 16547.86,10164.72 ; 16546.39,10168.26 ccw(c16551.39,10168.26) 16547.86,10164.72 ; 16546.39,10168.26 ccw(c16551.39,10168.26) 16547.86,10164.72 ; 16546.39,10168.26 ccw(c16551.39,10168.26) 16547.86,10164.72 ; 16546.39,10168.26 ccw(c16551.39,10168.26) 16547.86,10164.72 ; 16546.39,10168.26 ccw(c16551.39,10168.26) 16547.86,10164.72 ; 16546.39,10168.26 ccw(c16551.39,10168.26) 16547.86,10164.72 ; 16546.39,10168.26 ccw(c16551.39,10168.26) 16547.86,10164.72 ; 16546.39,10168.26 ccw(c16551.39,10168.26) 16547.86,10164.72 ; 16546.39,10168.26 ccw(c16551.39,10168.26) 16547.86,10164.72 ; 16546.39,10168.26 ccw(c16551.39,10168.26) 16547.86,10164.71 ; 16547.86,10164.71 16560.79,10151.74 ; 16560.79,10151.74 cw(c16557.25,10148.21) 16562.25,10148.3 ; 16560.79,10151.74 cw(c16557.25,10148.21) 16562.25,10148.3 ; 16560.79,10151.74 cw(c16557.25,10148.21) 16562.25,10148.3 ; 16560.79,10151.74 cw(c16557.25,10148.21) 16562.25,10148.3 ; 16560.79,10151.74 cw(c16557.25,10148.21) 16562.25,10148.3 ; 16560.79,10151.74 cw(c16557.25,10148.21) 16562.25,10148.3 ; 16560.79,10151.74 cw(c16557.25,10148.21) 16562.25,10148.3 ; 16560.79,10151.74 cw(c16557.25,10148.21) 16562.25,10148.3 ; 16560.79,10151.74 cw(c16557.25,10148.21) 16562.25,10148.3 ; 16560.79,10151.74 cw(c16557.25,10148.21) 16562.25,10148.3 ; 16560.79,10151.74 cw(c16557.25,10148.21) 16562.25,10148.3 ; 16560.79,10151.74 cw(c16557.25,10148.21) 16562.25,10148.3 ; 16560.79,10151.74 cw(c16557.25,10148.21) 16562.25,10148.3 ; 16560.79,10151.74 cw(c16557.25,10148.21) 16562.25,10148.3 ; 16560.79,10151.74 cw(c16557.25,10148.21) 16562.25,10148.3 ; 16560.79,10151.74 cw(c16557.25,10148.21) 16562.25,10148.3
  Bottom 6+gnd w5: U2.39@16562.01,10236.22 v1@16562.01,10298.06
UI_MISO: IC4.2 R76.1 | length 2893.4
  Top Layer 1 w5: IC4.2@17508.39,11260.94 17508.39,11217.28 v1(17509.48,11216.18) ; R76.1@19345.28,10703.82 19410.59,10703.82 v1(19411.14,10704.37)
  Unused w5: v1(17509.48,11216.18) 17509.48,11219.09 17515.79,11225.4 17515.79,11231.33 17842.4,11557.94 18669.17,11557.94 18820,11407.1 18820,11281.34 18907.48,11193.86 18907.48,11082.39 18832.13,11007.04 18832.13,10852.54 18871.61,10813.07 18965.75,10813.07 19074.44,10704.37 v1(19411.14,10704.37)
USB_FS_DM: IC1.103 R136.1 | length 4335.2
  Top Layer 1 w5: IC1.103@17057.76,11134.88 17101.66,11134.88 17106.5,11130.04 v1(17108.15,11130.04) ; R136.1@19921.18,12670 19950,12670 19980,12700 v1(19980,12720)
  Layer 3 w5: v1(17108.15,11130.04) 17110.2,11132.1 17115.18,11132.1 17116.45,11133.37 17152.84,11133.37 17405,11385.53 17405,11385.83 17619.63,11600.46 19072.34,11600.46 19152.34,11680.46 19465.57,11680.46 19537.55,11752.45 19922.45,11752.45 20118.97,11948.97 20118.97,12602.78 20001.74,12720 v1(19980,12720)
USB_FS_DP: IC1.104 R135.1 | length 4303.4
  Top Layer 1 w5: IC1.104@17057.76,11154.57 17058.36,11155.17 17106.54,11155.17 v1(17107.14,11155.77) ; R135.1@19921.18,12770 19923.67,12767.52 19972.48,12767.52 20000,12740 v1(20000,12700)
  Layer 3 w5: v1(17107.14,11155.77) 17110.05,11155.77 17117.06,11148.76 17153.79,11148.76 17620.13,11615.1 19066.28,11615.1 19146.28,11695.1 19459.5,11695.1 19527.2,11762.8 19912.1,11762.8 20104.33,11955.03 20104.33,12595.67 v1(20000,12700)
USB_FS_SOF: IC1.100 TP9.1 | length 4220.9
  Top Layer 1 w5: v1(17004.46,11078.28) 17005.68,11077.05 17056.53,11077.05 IC1.100@17057.76,11075.83
  Layer 3 w5: v1(17004.46,11078.28) 17049.34,11123.16 17049.34,11133.86 17096.63,11181.15 17117.65,11181.15 17130.04,11168.76 17144.94,11168.76 17611.28,11635.1 19057.99,11635.1 19142.32,11719.43 19449.43,11719.43 19512.8,11782.8 19897.69,11782.8 20080,11965.11 20080,12480 19990,12570 TP9.1@19925,12570
USB_FS_VBUS: H2.4 IC1.101 TP11.1 | length 4612.7
  Top Layer 1 w5: IC1.101@17057.76,11095.51 17058.88,11096.64 17113.16,11096.64 17129.95,11113.43 17141.23,11113.43 v5(17141.46,11113.66) ; TP11.1@17136.46,11118.66 TP11.1@17136.46,11128.66
  Layer 3 w5: v5(17141.46,11113.66) 17140.45,11114.67 17101.78,11114.67 17091.77,11124.68 17091.77,11162.14 17100.77,11171.15 17113.51,11171.15 17125.89,11158.76 17149.65,11158.76 17615.99,11625.1 19062.14,11625.1 19145.86,11708.82 19453.82,11708.82 19517.8,11772.8 19902.69,11772.8 20090.61,11960.71 20090.61,12579.39 19800,12870 H2.4@19749.81,12870
V_BAT: C97.2 IC20.2 L2.2 Q3.2 R21.2 R52.2 R125.2 TP15.1 | length 1766.8
  Top Layer 1 w10: 20548.98,13084.96 20634.02,13170 R125.2@20708.43,13170 20714.02,13175.59 20714.02,13200 20724.02,13210 20944.02,13210 20984.02,13170 21239.26,13170 21259.26,13150 v2(21264.02,13150) ; v2(20989.02,12860) 21031.57,12860 R21.2@21032.2,12859.37 21032.2,12835.67 21017.39,12820.85 Q3.2@21017.39,12789.37 ; R52.2@21195.2,12990 v2(21234.02,12990)
  Top Layer 1 w25: IC20.2@20423.39,12952.4 C97.2@20423.39,13029.37 ; C97.2@20424.02,13030 20503.33,13030 L2.2@20505.98,13027.34 ; 20470,12950 20500,12950 ; 20490,13140 20530,13100
  Bottom 6+gnd w10: v2(20989.02,12860) 21205.85,12860 21264.02,12918.16 21264.02,12960 v2(21234.02,12990) 21264.02,13020 v2(21264.02,13150)
V_USB: D2.1 H2.1 H2.2 H2.3 IC20.1 R11.2 TP12.1 | length 1577.1
  Top Layer 1 w10: v2(20386.87,12840) 20421.33,12840 20422.81,12838.51 ; v2(20386.87,12918.02) 20413.32,12891.57 20413.32,12887.66 IC20.1@20423.22,12877.76 ; v2(20387.12,12878.56) 20387.33,12878.35 20422.2,12878.35 20422.97,12877.57 20423.16,12877.76 IC20.1@20423.22,12877.76 ; D2.1@20392.02,12762.1 20392.99,12762.1 20397.92,12762.1 20448.84,12711.18 R11.2@20479.02,12711.18 ; IC20.1@20423.39,12877.6 IC20.1@20423.22,12877.76
  Top Layer 1 w25: D2.1@20392.99,12762.1 20422.81,12791.92 20422.81,12838.51 IC20.1@20422.81,12877.03 ; IC20.1@20422.84,12878.09 IC20.1@20423.16,12877.76
  Layer 3 w25: TP12.1@18847.89,12700.05 19104.81,12956.98 19104.81,12990.7 19134.1,13019.99 19175.52,13019.99 19225.53,13070 H2.2@19749.81,13070
  Bottom 6+gnd w10: v2@20379.02,12880 20380.46,12878.56 v2(20387.12,12878.56)
  Bottom 6+gnd w40: 20262.45,12850 20349.02,12850 v2@20379.02,12880
pads on no net: ENC1.MT1 ENC1.MT2 ENC2.MT1 ENC2.MT2 ENC3.MT1 ENC3.MT2 ENC4.MT1 ENC4.MT2 ENC5.MT1 ENC5.MT2 H3.4 H3.5 H3.6 H3.7 H3.17 H3.18 H3.35 H3.36 H3.37 H3.38 H3.39 H3.40 H3.MP1 H7.1 H7.2 H7.3 H7.4 H7.5 H7.6 IC1.6 IC1.7 IC1.95 IC1.117 IC1.143 IC2.6 IC2.9 IC2.26 IC2.27 IC2.28 IC2.35 IC2.40 IC2.41 IC2.42 IC2.45 IC2.46 IC2.47 IC2.48 IC2.69 IC2.70 IC2.87 IC2.88 IC2.92 IC2.95 IC2.96 IC2.98 IC2.100 IC2.116 IC2.117 IC2.118 IC2.119 IC2.122 IC2.127 IC2.128 IC2.129 IC2.134 IC2.137 IC2.143 IC8.2 IC8.3 IC8.4 IC14.6 IC14.7 IC14.8 IC14.9 IC14.11 IC14.12 IC14.13 IC14.14 IC15.7 IC16.7 IC17.7 IC17.10 IC21.6 J1.31@15477.48,12376.18 J1.32@16808.19,12376.18 J3.13 J3.14 J4.13 J4.14 J20. J20.S1 J20.S2 J20.S3 J20.S4 JK1.1 JK1.3 JK1.6 JK2.1 JK2.3 JK2.6 JK3.1 JK3.3 JK3.6 MH1.0 MH2.0 MH3.0 MH4.0 MH5.0 MH6.0 MH7. MH8.0 PJ1.3 PJ1.5 PJ1.7 PJ1.23 PJ1.25 PJ1.27 PJ2.3 PJ2.5 PJ2.7 PJ2.23 PJ2.25 PJ2.27 R37.MT1 SW1. SW2. SW3. SW4. SW5. SW6. SW6.1 SW7. SW8. U1.36 U1.40 U2.36 U2.40 U3.36 U3.40 U4.36 U4.40 U6.3
copper on no net: | length 4834.7
  Top Layer 1 w5: 14658.33,10139.04 14713.45,10139.04 14713.33,10139.16 14713.33,10213.49 14712.33,10214.49 v1(14712.33,10269.26) ; v1(14824.45,10108.14) 14824.87,10108.56 14824.87,10118.51 14828.33,10121.98 14828.33,10153.76 ; 14903.84,10717.47 14904,10717.31 ; 16212.24,11115.2 16256.55,11115.2 v1(16286.01,11085.73)
  Top Layer 1 w8: v1(14713.33,10080.26) 14713.33,10111.36 14713.45,10111.48
  Top Layer 1 w25: 19658.83,13044.99 19658.83,13082.34 19666.48,13089.99
  Unused w5: v1(16405.87,10915.04) 16877.93,10915.04 16955.24,10992.34 17008.68,10992.34 17073.16,10927.86 17139.9,10927.86 17271.29,11059.25 17271.29,11165.94 17345.31,11239.96 17496.15,11239.96 17834.12,11577.94 18680.88,11577.94 18840,11418.82 18840,11289.62 18928.77,11200.86 18928.77,11074.52 18852.13,10997.89 18852.13,10886.68 18884.63,10854.19 18904.63,10854.19 18915,10843.82 18955,10843.82 19050,10748.82 v1(19085,10748.82)
  Layer 3 w5: 15360.77,9718.23 15364,9715 15364,9691.03 ; 15391.7,9729.63 15395.47,9725.86 15395.47,9703.04 15396.7,9701.81 15396.7,9689.63 ; 15551.7,9689.63 15552.91,9690.84 15552.91,9720.15 ; 15584.63,9726.7 15584.63,9715.77 15584.55,9715.68 15584.55,9691.78 15586.7,9689.63 ; v1(16286.01,11085.73) 16333.09,11085.73 16405.87,11012.95 v1(16405.87,10915.04) ; 16669.07,9722.42 16672.3,9719.19 16672.3,9695.22 ; 16700,9733.82 16703.77,9730.05 16703.77,9707.23 16705,9706 16705,9693.82 ; 16860,9693.82 16861.21,9695.03 16861.21,9724.34 ; 16892.93,9730.89 16892.93,9719.96 16892.85,9719.87 16892.85,9695.97 16895,9693.82
  Bottom 6+gnd w5: 14650.33,10371.26 14711.33,10310.26 14711.33,10270.26 v1(14712.33,10269.26)
  other v3: 16552.09,10701.2
  other v5: 16480,11388.82

## Polygon pours and split planes (outlines as drawn)
GND on Layer 3 "GND_L03_P027" (solid, remove dead copper, pour order 27): 16011.74,11974.96 17405,11974.96 17405,10163.93 16011.74,10163.93
GND on Layer 3 "GND_L03_P026" (solid, remove dead copper, pour order 26): 15933.81,11973.01 14566.25,11973.01 14566.25,10161.99 15933.81,10161.99
no net on Layer 3 "NONET_L03_P012" (solid, remove dead copper, pour order 12): 16580,10860 16655,10860 16655,10747.12 16640.88,10732.99 16640.88,10718.95 16594.29,10718.95 16580,10733.23 16580,10750
no net on Layer 3 "NONET_L03_P013" (solid, remove dead copper, pour order 13): 16810,10940 16830.1,10919.9 16830.1,10764.74 16798.36,10732.99 16798.36,10710 16758.8,10711.29 16766.45,10741.02 16766.45,10896.45
V_USB on Layer 3 "NONET_L01_P-001" (solid, remove dead copper, pour order 63): 19930,12820 20409.02,12820 20409.02,12940 20025.71,12942.22 19753.78,13244.04 19700.92,13244.04 19700.92,12917.7 19799.74,12920.77
no net on Layer 3 "NONET_L03_P014" (solid, remove dead copper, pour order 14): 16858.98,10405 16908.98,10405 16908.98,10359.12 16908.22,10358.37 16908.22,10165.76 16908.98,10165 16843.98,10165 16843.98,10357.12 16861.09,10374.23 16858.98,10376.35